# Altium PCB LamplightController.PcbDoc
Units mm, origin at the board's own origin, x right, y up, seen from the top; angles counter-clockwise.
Board outline 48 x 84 mm, 2 copper layers (Top Layer, Bottom Layer), stack 1.5 mm thick; 75 components, 53 nets, 223 pads, 56 vias.
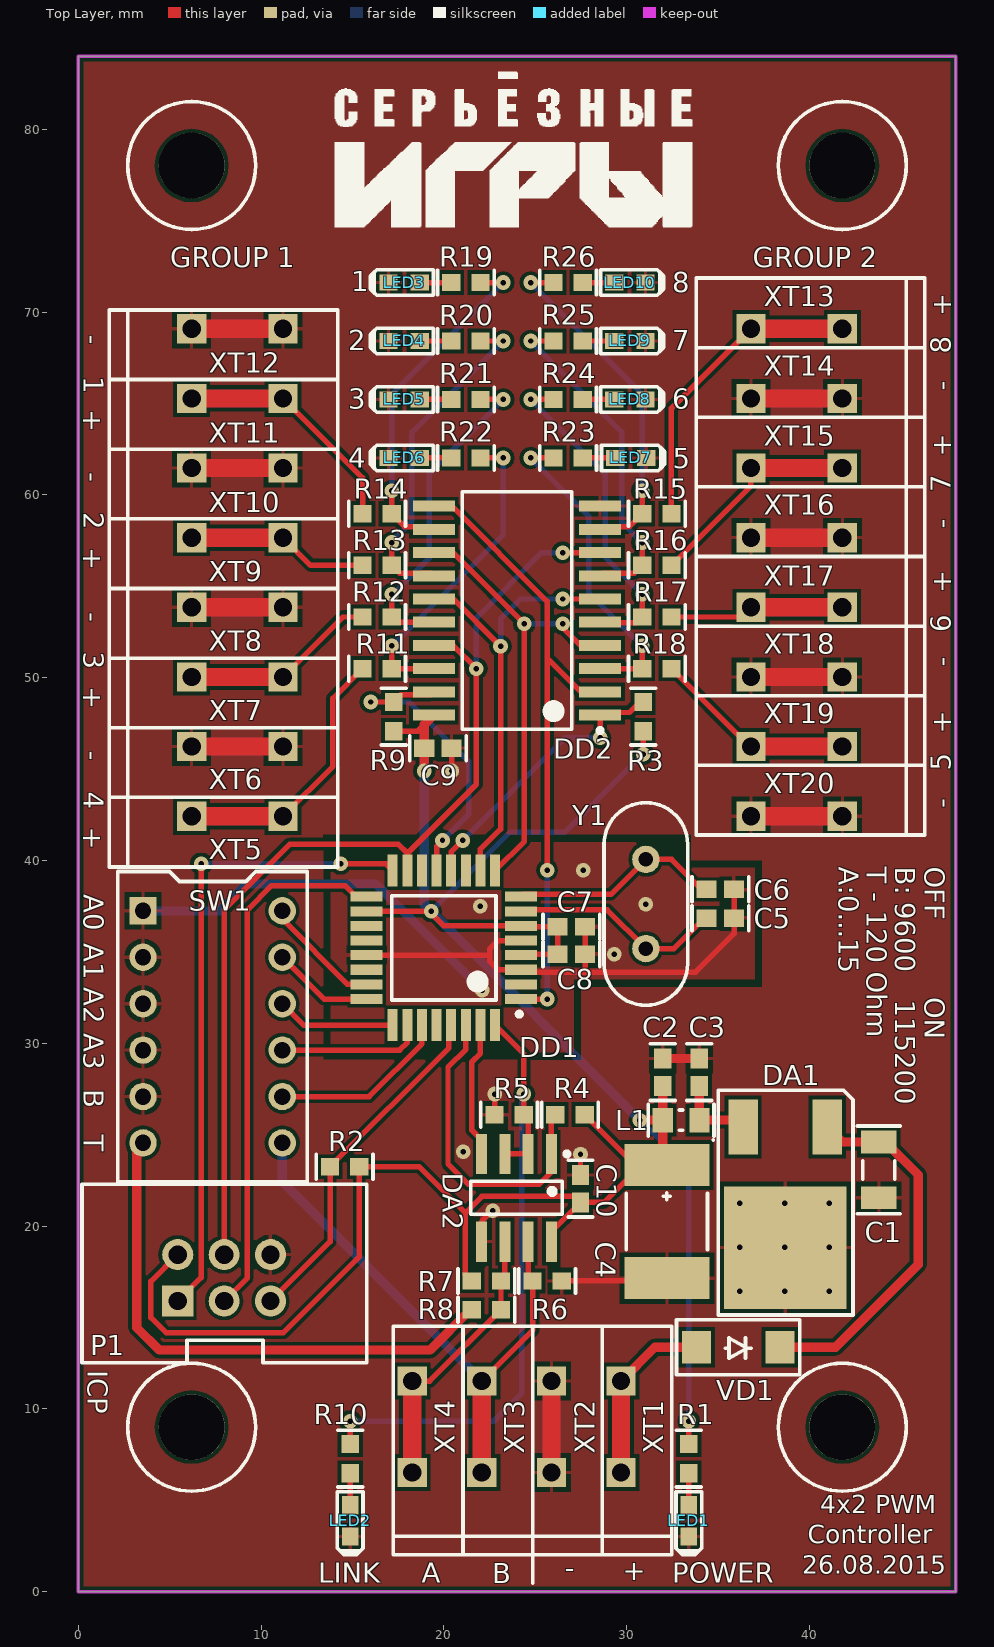
[diagram p0: Top Layer view]
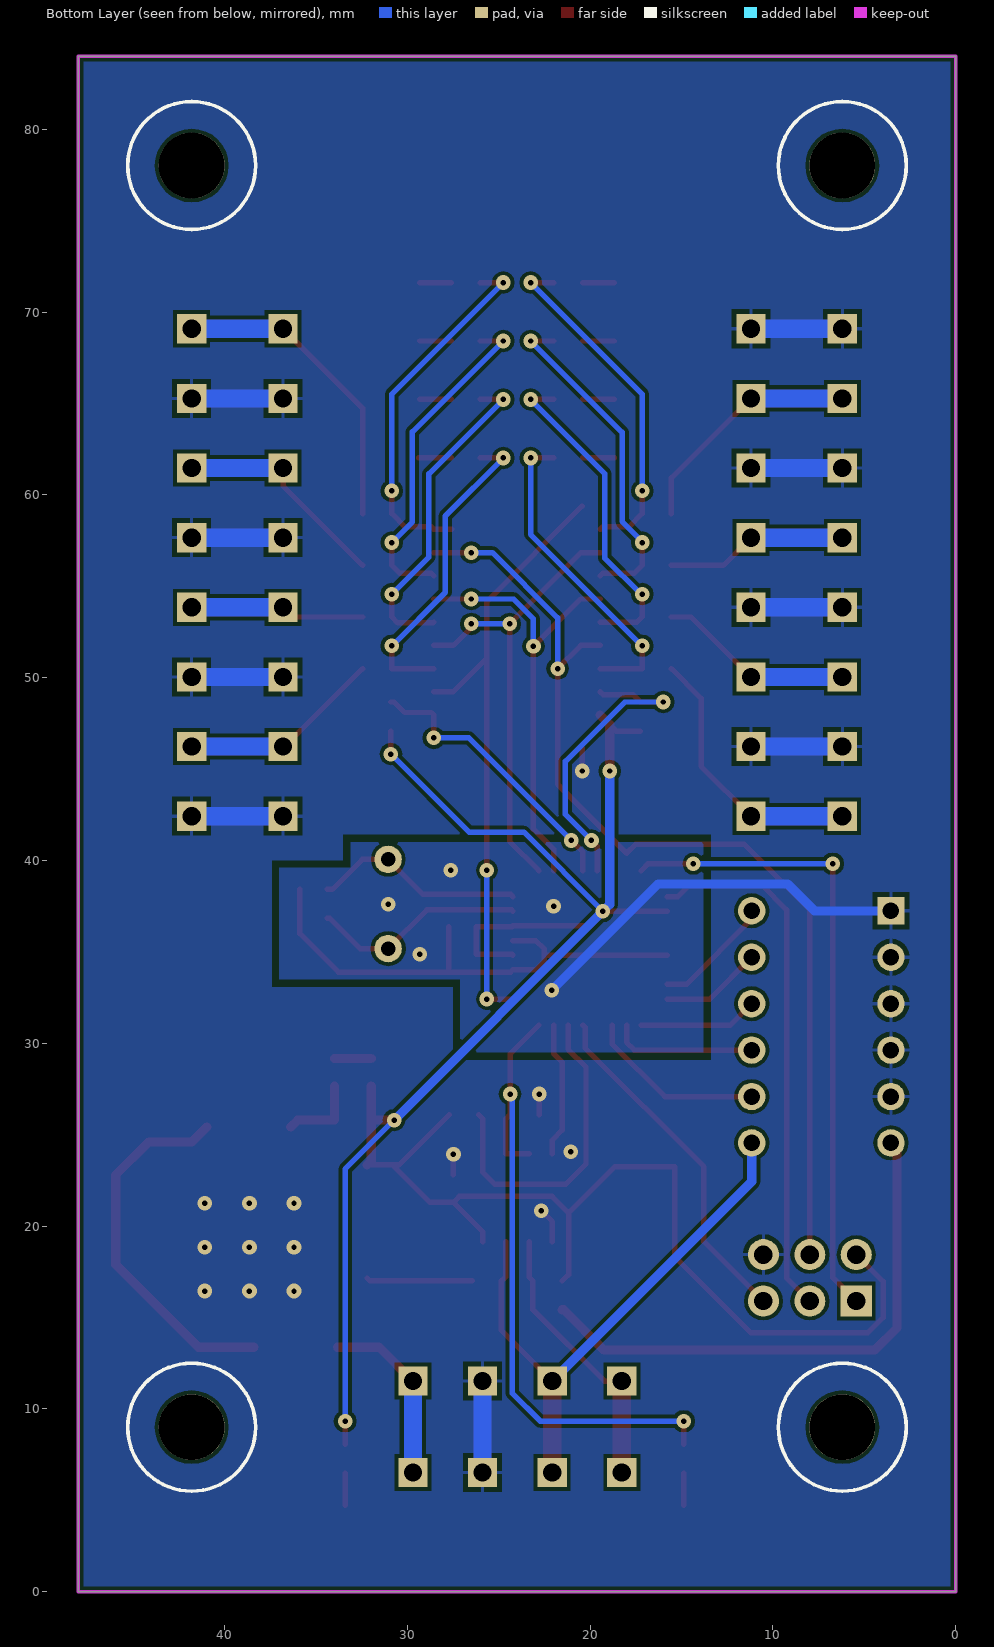
[diagram p1: Bottom Layer view, seen from below]
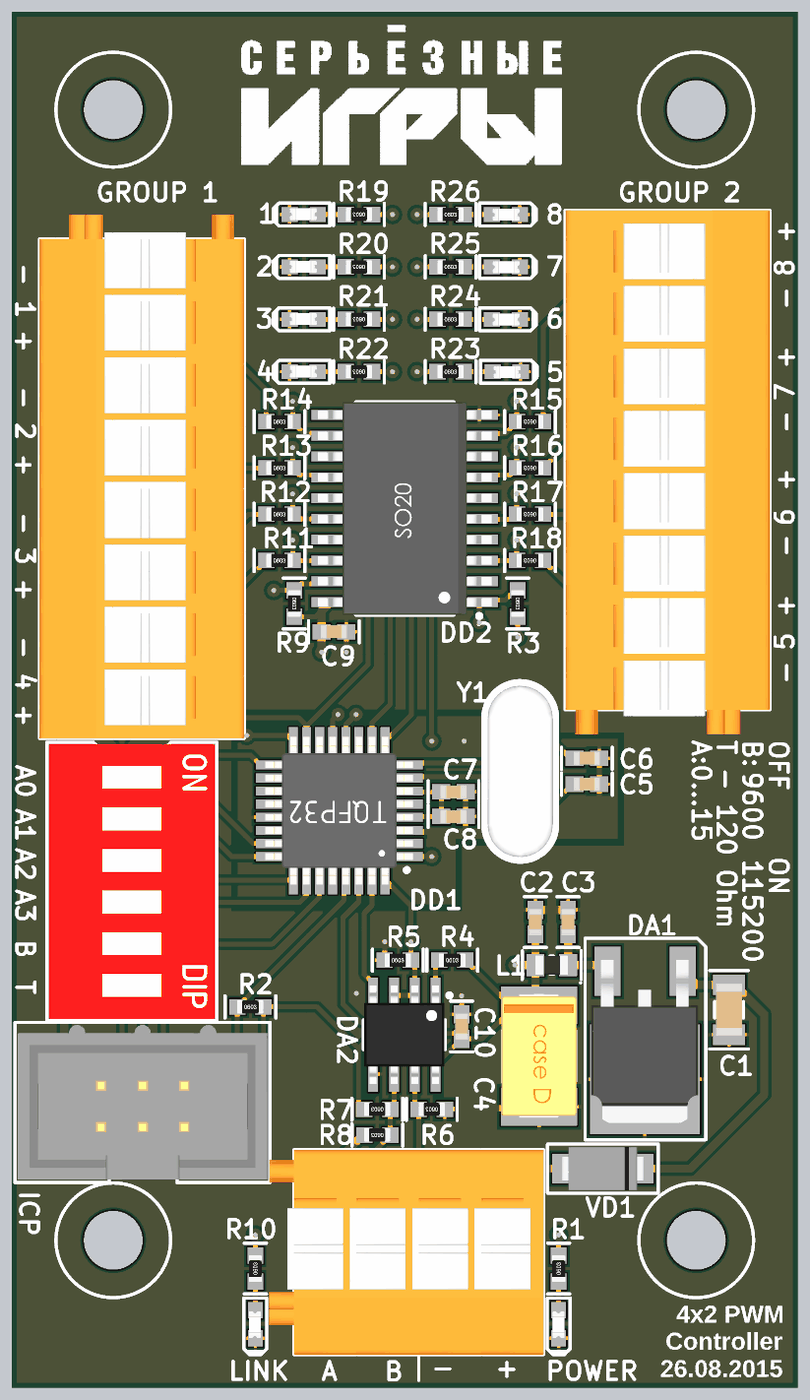
[diagram p2: 3D render of the assembled board from above, using the file's embedded part models]

## Layer stack, top to bottom
Top Solder: solder mask 0.0102, Solder Resist, Dk 3.5
Top Layer: signal copper 0
Dielectric 1: dielectric 1.5, FR-4, Dk 4.8
Bottom Layer: signal copper 0
Bottom Solder: solder mask 0.0102, Solder Resist, Dk 3.5

## Board outline
0,0 0,84 48,84 48,0

## Design rules (kind name [scope] priority, off if disabled: settings)
Clearance [All] p1: gap=0.2
ComponentClearance [All] p1 off: gap=0 collisioncheckmode=3 verticalgap=0.2 showdistances=FALSE
Height [All] p1: minheight=0 maxheight=50 prefheight=2
HoleSize [All] p1: absolutevalues=TRUE maxlimit=5 minlimit=0.3 maxpercent=80.000 minpercent=20.000
HoleToHoleClearance [All] p1: gap=0.2 allowstackedmicrovias=TRUE
MinimumSolderMaskSliver [All] p1: minsoldermaskwidth=0.1
PlaneClearance [All] p1: clearance=0.3
PlaneConnect PlaneConnect_VIA [IsVia] p1: planeconnectstyle=Direct reliefexpansion=0.508 reliefentries=4 reliefconductorwidth=0.254 reliefairgap=0.254
PlaneConnect PlaneConnect_PAD [All] p2: planeconnectstyle=Relief reliefexpansion=0.5 reliefentries=4 reliefconductorwidth=0.2 reliefairgap=0.2
PolygonConnect PolygonConnect_VIA [IsVia] p1: connectstyle=Direct reliefconductorwidth=0.254 reliefentries=4 polygonreliefangle="90 Angle" airgapwidth=0.254
PolygonConnect PolygonConnect_PAD [All] p2: connectstyle=Relief reliefconductorwidth=0.2 reliefentries=4 polygonreliefangle="90 Angle" airgapwidth=0.254
RoutingCorners [All] p1: cornerstyle=45-Degree minsetback=2 maxsetback=2
RoutingVias [All] p1: holewidth=0.3 width=0.8 viastyle="Through Hole" minholewidth=0.3 minwidth=0.8 maxholewidth=0.3 maxwidth=0.8
SilkToSilkClearance [All] p1: silktosilkclearance=0.2
SilkToSolderMaskClearance SilkscreenOverComponentPads [IsPad] p1: minsilkscreentomaskgap=0.2 clearancetoexposedcopper=TRUE
SolderMaskExpansion [All] p1: expansion=0.1
Width [All] p1: maxlimit=2 minlimit=0.2 preferedwidth=0.2 minimp=50.000000 maximp=50.000000 favimp=50.000000
19 further rules are at their usual default settings.

## Components (designator, comment, footprint, x,y, rotation, side; value= is the part's Value field where it differs from the comment)
C1 "C_1206" 1206_CAP 43.8,23.075 r90 top
C2 "C_0603" 0603_CAP 33.975,28.425 r270 top
C3 "C_0603" 0603_CAP 31.975,28.425 r270 top
C4 "C_caseD" "case D" 32.2,20.25 r270 top
C5 "C_0603" 0603_CAP 35.125,36.85 r180 top
C6 "C_0603" 0603_CAP 35.125,38.425 r180 top
C7 "C_0603" 0603_CAP 26.975,36.375 r180 top
C8 "C_0603" 0603_CAP 26.975,34.875 r180 top
C9 "C_0603" 0603_CAP 19.675,46.15 r0 top
C10 "C_0603" 0603_CAP 27.475,22.05 r90 top
DA1 "L78M05ABDT-TR" DPACK 40.975,25.425 r180 top
DA2 "MAX3443EESA" SOIC8 23.975,21.55 r270 top
DD1 "ATMEGA328P-AU" TQFP32 20,35.225 r180 top
DD2 "SN74ABT244ADW" SOIC20 24,53.675 r180 top
L1 "BLM21" 0805_IND 32.975,25.8 r180 top
LED1 "LED_0603" 0603_LED 33.4,3.875 r270 top
LED2 "LED_0603" 0603_LED 14.875,3.875 r270 top
LED3 "LED_0603" 0603_LED 17.825,71.625 r180 top
LED4 "LED_0603" 0603_LED 17.825,68.425 r180 top
LED5 "LED_0603" 0603_LED 17.825,65.225 r180 top
LED6 "LED_0603" 0603_LED 17.825,62.025 r180 top
LED7 "LED_0603" 0603_LED 30.225,62.025 r0 top
LED8 "LED_0603" 0603_LED 30.175,65.225 r0 top
LED9 "LED_0603" 0603_LED 30.175,68.425 r0 top
LED10 "LED_0603" 0603_LED 30.175,71.625 r0 top
P1 "BH-06M" BH-06M 5.425,15.875 r180 top
R1 "R_0603" 0603_RES 33.4,7.275 r90 top
R2 "R_0603" 0603_RES 14.575,23.25 r0 top
R3 "R_0603" 0603_RES 30.9,47.875 r270 top
R4 "R_0603" 0603_RES 26.9,26.1 r0 top
R5 "R_0603" 0603_RES 23.575,26.1 r0 top
R6 "R_0603" 0603_RES 25.65,17 r180 top
R7 "R_0603" 0603_RES 22.325,17 r180 top
R8 "R_0603" 0603_RES 22.325,15.425 r180 top
R9 "R_0603" 0603_RES 17.25,47.875 r270 top
R10 "R_0603" 0603_RES 14.875,7.275 r90 top
R11 "R_0603" 0603_RES 16.35,50.5 r0 top
R12 "R_0603" 0603_RES 16.35,53.325 r0 top
R13 "R_0603" 0603_RES 16.35,56.15 r0 top
R14 "R_0603" 0603_RES 16.35,58.975 r0 top
R15 "R_0603" 0603_RES 31.65,58.975 r180 top
R16 "R_0603" 0603_RES 31.65,56.15 r180 top
R17 "R_0603" 0603_RES 31.65,53.325 r180 top
R18 "R_0603" 0603_RES 31.65,50.5 r180 top
R19 "R_0603" 0603_RES 21.2,71.625 r180 top
R20 "R_0603" 0603_RES 21.2,68.425 r180 top
R21 "R_0603" 0603_RES 21.2,65.225 r180 top
R22 "R_0603" 0603_RES 21.2,62.025 r180 top
R23 "R_0603" 0603_RES 26.8,62.025 r0 top
R24 "R_0603" 0603_RES 26.8,65.225 r0 top
R25 "R_0603" 0603_RES 26.8,68.425 r0 top
R26 "R_0603" 0603_RES 26.8,71.625 r0 top
SW1 "SWD1-6" "DIP_SW 12" 7.35,30.9 r0 top
VD1 "US1M" SMA 36.1,13.375 r0 top
XT1 "235-101" wago235-101 29.695,9.025 r0 top
XT2 "235-101" wago235-101 25.885,9.025 r0 top
XT3 "235-101" wago235-101 22.075,9.025 r0 top
XT4 "235-101" wago235-101 18.265,9.025 r0 top
XT5 "235-101" wago235-101 8.7,42.425 r270 top
XT6 "235-101" wago235-101 8.7,46.235 r270 top
XT7 "235-101" wago235-101 8.7,50.045 r270 top
XT8 "235-101" wago235-101 8.7,53.855 r270 top
XT9 "235-101" wago235-101 8.7,57.665 r270 top
XT10 "235-101" wago235-101 8.7,61.475 r270 top
XT11 "235-101" wago235-101 8.7,65.285 r270 top
XT12 "235-101" wago235-101 8.7,69.095 r270 top
XT13 "235-101" wago235-101 39.3,69.095 r90 top
XT14 "235-101" wago235-101 39.3,65.285 r90 top
XT15 "235-101" wago235-101 39.3,61.475 r90 top
XT16 "235-101" wago235-101 39.3,57.665 r90 top
XT17 "235-101" wago235-101 39.3,53.855 r90 top
XT18 "235-101" wago235-101 39.3,50.045 r90 top
XT19 "235-101" wago235-101 39.3,46.235 r90 top
XT20 "235-101" wago235-101 39.3,42.425 r90 top
Y1 "HC49S" HC49S 31.05,37.625 r270 top

## Footprints (in the part's own frame and the unit in brackets; to place one, negate y for a bottom-side part, rotate by r counter-clockwise, add the part's x,y. Pads: shape width x height; smd on the part's side, far side on the other; paste and mask are expansions set on the pad)
0603_CAP [mm] "Chip Capacitor, 2-Leads, Body 1,60x0,80mm, IPC Medium Density"
  rect 1.1x0.95 smd: 1(-0.75,0) 2(0.75,0)
  silkscreen extent -1.55,-0.68 1.55,0.67, body extent -0.8,-0.4 0.8,0.4, height 0.8
0603_LED [mm]
  rect 1x0.9 smd: 1(-0.85,0) 2(0.85,0)
  silkscreen extent -1.6,-0.7 1.85,0.7, body extent -0.8,-0.37 0.85,0.35, height 0.68
0603_RES [mm] "Chip Resistor, 2-Leads, Body 1,60x0,80mm, IPC Medium Density"
  rect 1x0.95 smd: 1(-0.8,0) 2(0.8,0)
  silkscreen extent -1.55,-0.67 1.55,0.68, body extent -0.8,-0.4 0.8,0.4, height 0.45
0805_IND [mm]
  rect 1.1x1.35 smd: 1(-1,0) 2(1,0)
  silkscreen extent -1.8,-0.88 1.8,0.87, body extent -1,-0.6 1,0.6, height 0.95
1206_CAP [mm] "Chip Capacitor, 2-Leads, Body 3,30x1,70mm, IPC Medium Density"
  rect 1.25x1.95 smd: 1(-1.525,0) 2(1.525,0)
  silkscreen extent -2.4,-1.18 2.4,1.17, body extent -1.6,-0.8 1.6,0.8, height 0.78
BH-06M [mm] "BH-06M ICP Prog"
  rect 1.7x1.7 hole 1: 1(-0.015,-0.025)
  round 1.7 hole 1: 2(-0.015,-2.565) 3(-2.555,-0.025) 4(-2.555,-2.565) 5(-5.095,-0.025) 6(-5.095,-2.565)
  silkscreen extent -10.35,-6.43 5.23,3.35, body extent -10.19,-6.27 5.05,3.18, height 9.1
"case D" [mm] "Chip Capacitor Tantalum CASE D, 2-Leads, Body 7,30x4,30mm, IPC Medium Density"
  rect 2.3x4.65 smd: 1(-3.1,0) 2(3.1,0)
  silkscreen extent -4.51,-2.23 1.55,2.59, body extent -3.8,-2.3 3.8,2.3, height 3.1
"DIP_SW 12" [mm] "DIP Switch 2.54mm 6poles"
  rect 1.5x1.5 hole 0.9: 1(-3.81,6.35)
  round 1.5 hole 0.9: 2(-3.81,3.81) 3(-3.81,1.27) 4(-3.81,-1.27) 5(-3.81,-3.81) 6(-3.81,-6.35) 7(3.81,-6.35) 8(3.81,-3.81) 9(3.81,-1.27) 10(3.81,1.27) 11(3.81,3.81) 12(3.81,6.35)
  silkscreen extent -5.2,-8.47 5.18,8.5, body extent -5.08,-8.37 5.08,8.39, height 7.1
DPACK [mm]
  rect 1.6x3 smd: 1(0,0) 2(4.6,0)
  rect 6.7x6.7 smd: 3(2.3,6.6)
  silkscreen extent -1.41,-2.01 5.96,10.29, body extent -0.95,-0.68 5.59,9.26, height 2.39
HC49S [mm]
  round 1.5 hole 0.8: 1(-2.44,0) 2(2.44,0)
  silkscreen extent -5.54,-2.29 5.54,2.29, body extent -5.49,-2.25 5.49,2.25, height 3.6
SMA [mm]
  rect 1.6x1.8 smd: 1(-2.286,0) 2(2.286,0)
  silkscreen extent -3.37,-1.5 3.38,1.5, body extent -2.56,-1.33 2.55,1.33, height 2.12
SOIC8 [mm] "SOIC, 8-Leads, Body 4,90x3,90mm, Pitch 1,27mm, IPC Medium Density"
  rect 2.2x0.6 smd: 1(-2.4,1.905) 2(-2.4,0.635) 3(-2.4,-0.635) 4(-2.4,-1.905) 5(2.4,-1.905) 6(2.4,-0.635) 7(2.4,0.635) 8(2.4,1.905)
  silkscreen extent -2.52,-2.5 0.9,2.88, body extent -3,-2.45 3,2.45, height 1.75
SOIC20 [mm] "SOIC, 20-Leads, Body 12,80x7,50mm, Pitch 1,27mm, IPC Medium Density"
  rect 2.3x0.6 smd: 1(-4.55,5.715) 2(-4.55,4.445) 3(-4.55,3.175) 4(-4.55,1.905) 5(-4.55,0.635) 6(-4.55,-0.635) 7(-4.55,-1.905) 8(-4.55,-3.175) 9(-4.55,-4.445) 10(-4.55,-5.715) 11(4.55,-5.715) 12(4.55,-4.445) 13(4.55,-3.175) 14(4.55,-1.905) 15(4.55,-0.635) 16(4.55,0.635) 17(4.55,1.905) 18(4.55,3.175) 19(4.55,4.445) 20(4.55,5.715)
  silkscreen extent -4.68,-6.5 3,6.69, body extent -5.31,-6.5 5.32,6.5, height 2.66
TQFP32 [mm] "TQFP, 32-Leads, Body 7,00x7,00mm, Pitch 0,80mm, IPC Medium Density"
  rect 1.75x0.55 smd: 1(-4.225,2.8) 2(-4.225,2) 3(-4.225,1.2) 4(-4.225,0.4) 5(-4.225,-0.4) 6(-4.225,-1.2) 7(-4.225,-2) 8(-4.225,-2.8) 17(4.225,-2.8) 18(4.225,-2) 19(4.225,-1.2) 20(4.225,-0.4) 21(4.225,0.4) 22(4.225,1.2) 23(4.225,2) 24(4.225,2.8)
  rect 0.55x1.75 smd: 9(-2.8,-4.225) 10(-2,-4.225) 11(-1.2,-4.225) 12(-0.4,-4.225) 13(0.4,-4.225) 14(1.2,-4.225) 15(2,-4.225) 16(2.8,-4.225) 25(2.8,4.225) 26(2,4.225) 27(1.2,4.225) 28(0.4,4.225) 29(-0.4,4.225) 30(-1.2,4.225) 31(-2,4.225) 32(-2.8,4.225)
  silkscreen extent -4.25,-2.85 2.85,3.75, body extent -4.51,-4.51 4.51,4.51, height 1.1
wago235-101 [mm] "1-conductor PCB terminal strip; 2 solder pins/pole; 2-pole; pin spacing 3.81 mm / 0.15 in; with push-button"
  rect 1.6x1.6 hole 1: 1(0,-2.5) 1(0,2.5)
  silkscreen extent -1.03,-7 2.78,5.5, body extent -2.53,-7 2.78,5.5, height 15.5

## Part data
C1: "Конденсатор (1206)"
C2 C3 C5 C6 C7 C8 C9 C10: "Конденсатор (0603)"
C4: "Танаталовый чип конденсатор (Case D)"
DA1: "Precision 500 mA regulator 5V"
DA2: "5 V RS-485 Transceiver"
DD1: "ATMEL 8-BIT MICROCONTROLLER WITH 32KBYTES  IN-SYSTEM PROGRAMMABLE FLASH 2K RAM 20MHz"
DD2: "Octal Buffers/Drivers with 3-state outputs"
L1: "Chip Ferrite Bead (0805 Size) BLM21PG221SH1"
LED1 LED2 LED3 LED4 LED5 LED6 LED7 LED8 LED9 LED10: "Светодиод 0603"
R1 R2 R10 R11 R12 R13 R14 R15 R16 R17 R18 R19 R20 R21 R22 R23 R24 R25 R26: "Резистор 0.1 Вт (0603)"
R3 R4 R5 R6 R7 R8 R9: "Резистор 0.063 Вт (0603)"
SW1: "DIP-переключатель 2-х полож. 6 кн. 2.54mm"
VD1: "Диод 1А до 1000V"
XT1 XT2 XT3 XT4 XT5 XT6 XT7 XT8 XT9 XT10 XT11 XT12 XT13 XT14 XT15 XT16 XT17 XT18 XT19 XT20: library part wago235-101, "235-101 - 1-CONDUCTOR PCB TERMINAL BLOCK 2 SOLDER PINS / POLE 1 POLE PIN SPACING 3.81 MM / 0.15 IN WITH PUSH BOTTONS"
Y1: library part Quartz_HC49S, "Кварцевый резонатор (HC49S)"

## Free pads (board coordinates)
  round 3.6 hole 3.6 unplated: 0(6.2,9) 0(6.2,78.025) 0(41.8,9) 0(41.8,78.025)

## Via types
v1: diameter 0.8, hole 0.3, Top Layer to Bottom Layer, tented both sides, 47 vias
v2: diameter 0.8, hole 0.3, Top Layer to Bottom Layer, tented bottom, 9 vias

## Nets (pads, with @x,y where several pads share a name; then routed paths per layer and width w, separated by ;. In a path a pad name is that pad's centre, name@x,y a point inside that pad or via, vN(x,y) a via of type N, cw(c..) or ccw(c..) an arc to the next point about the centre after c; other vN are vias at no path point)
B: DA2.7 R6.2 SW1.7 XT3.1 | length 31.4
  Top Layer w0.3: XT3.1@22.075,11.525 24.85,14.3 R6.2 24.61,17.24 DA2.7
  Top Layer w1: XT3.1@22.075,6.525 XT3.1@22.075,11.525
  Bottom Layer w0.5: SW1.7 11.16,22.44 XT3.1@22.075,11.525
BSW: R8.2 SW1.6 | length 30
  Top Layer w0.5: SW1.6 3.2,24.21 3.2,14.45 4.425,13.225 19.25,13.225 21.45,15.425 R8.2
GND: C1.1 C2.1 C3.1 C4.2 C5.1 C6.1 C7.1 C8.1 C9.2 C10.2 DA1.3 DA2.5 DD1.3 DD1.5 DD1.21 DD2.10 LED1.2 LED2.2 LED3.2 LED4.2 LED5.2 LED6.2 LED7.2 LED8.2 LED9.2 LED10.2 P1.6 R5.1 R6.1 SW1.1 SW1.2 SW1.3 SW1.4 SW1.5 XT2.1 XT6.1 XT8.1 XT10.1 XT12.1 XT14.1 XT16.1 XT18.1 XT20.1 | length 153.6
  Top Layer w0.3: DD1.21 22.5,34.825 ; v1(20.425,44.9) C9.2 ; DA2.5 22.07,20.245 v1(22.676,20.851) ; R5.1 v1(22.775,27.225) ; DD1.5 22.975,35.625 22.5,35.15 22.5,34.825 ; R6.1 32.05,17 C4.2 ; C10.2 v1(27.475,23.925) ; C7.1 C8.1 27.725,33.925 27.7,33.9 ; C6.1 C5.1 35.875,36 33.775,33.9 27.7,33.9 ; 22.5,34.825 22.5,34.5 22.975,34.025 DD1.3 24.35,33.9 27.7,33.9
  Top Layer w0.5: C3.1 C2.1
  Top Layer w1: XT6.1@6.2,46.235 XT6.1@11.2,46.235 ; XT8.1@6.2,53.855 XT8.1@11.2,53.855 ; XT10.1@6.2,61.475 XT10.1@11.2,61.475 ; XT12.1@6.2,69.095 XT12.1@11.2,69.095 ; XT2.1@25.885,6.525 XT2.1@25.885,11.525 ; XT20.1@36.8,42.425 XT20.1@41.8,42.425 ; XT18.1@36.8,50.045 XT18.1@41.8,50.045 ; XT16.1@36.8,57.665 XT16.1@41.8,57.665 ; XT14.1@36.8,65.285 XT14.1@41.8,65.285
  Bottom Layer w0.3: v1@22.826,20.851 v1@22.826,20.926
  Bottom Layer w0.5: SW1.1 7.725,37.25 9.2,38.725 16.275,38.725 v1(22.1,32.9)
  Bottom Layer w1: XT6.1@6.2,46.235 XT6.1@11.2,46.235 ; XT8.1@6.2,53.855 XT8.1@11.2,53.855 ; XT10.1@6.2,61.475 XT10.1@11.2,61.475 ; XT12.1@6.2,69.095 XT12.1@11.2,69.095 ; XT2.1@25.885,6.525 XT2.1@25.885,11.525 ; XT20.1@36.8,42.425 XT20.1@41.8,42.425 ; XT18.1@36.8,50.045 XT18.1@41.8,50.045 ; XT16.1@36.8,57.665 XT16.1@41.8,57.665 ; XT14.1@36.8,65.285 XT14.1@41.8,65.285
  other v1: 21.05,24.075 29.325,34.875 22,37.5 31.05,37.615 27.625,39.475
  other v2: 36.2,16.45 38.638,16.45 41.075,16.45 36.2,18.85 38.638,18.85 41.075,18.85 36.2,21.25 38.638,21.25 41.075,21.25
MISO: DD1.16 P1.1 | length 35.1
  Top Layer w0.3: P1.1 6.725,17.185 v1(6.725,39.825) ; v1(14.35,39.825) 16.825,39.825 DD1.16
  Bottom Layer w0.3: v1(6.725,39.825) v1(14.35,39.825)
MOSI: DD1.15 DD2.8 DD2.17 P1.4 | length 56.1
  Top Layer w0.3: P1.4 7.98,37.305 11.575,40.9 17.5,40.9 18,40.4 21.775,44.175 v1(21.775,50.5) 20.505,51.77 DD2.17 ; v1(26.5,56.85) DD2.8
  Bottom Layer w0.3: v1(21.775,50.5) 21.775,53.275 25.35,56.85 v1(26.5,56.85)
NetC1_2: C1.2 DA1.1 VD1.2 | length 20.4
  Top Layer w0.5: VD1.2 41.425,13.375 45.95,17.9 45.95,22.8 44.15,24.6 C1.2 41.8,24.6 DA1.1
NetC2_2: C2.2 DA1.2 L1.1 | length 4.4
  Top Layer w0.5: C2.2 L1.1 36,25.8 DA1.2
NetDA2_6: DA2.6 R7.1 R8.1 XT4.1 | length 15.3
  Top Layer w0.3: XT4.1@18.265,11.525 19.225,11.525 R8.1 R7.1 23.34,17.215 DA2.6
  Top Layer w1: XT4.1@18.265,6.525 XT4.1@18.265,11.525
NetDD1_23: DD1.23 SW1.12 | length 6.6
  Top Layer w0.3: SW1.12 11.16,36.79 14.725,33.225 DD1.23
NetDD1_24: DD1.24 SW1.11 | length 5.6
  Top Layer w0.3: SW1.11 13.445,32.425 DD1.24
NetDD1_25: DD1.25 SW1.10 | length 6.5
  Top Layer w0.3: SW1.10 12.33,31 DD1.25
NetDD1_26: DD1.26 SW1.9 | length 8
  Top Layer w0.3: SW1.9 17.58,29.63 18,30.05 DD1.26
NetDD1_27: DD1.27 SW1.8 | length 9.9
  Top Layer w0.3: SW1.8 15.915,27.09 18.8,29.975 DD1.27
NetLED1_1: LED1.1 R1.1 | length 1.8
  Top Layer w0.3: LED1.1 R1.1
NetLED2_1: LED2.1 R10.1 | length 1.8
  Top Layer w0.3: LED2.1 R10.1
NetLED3_1: LED3.1 R19.2 | length 1.7
  Top Layer w0.3: LED3.1 R19.2
NetLED4_1: LED4.1 R20.2 | length 1.7
  Top Layer w0.3: LED4.1 R20.2
NetLED5_1: LED5.1 R21.2 | length 1.7
  Top Layer w0.3: LED5.1 R21.2
NetLED6_1: LED6.1 R22.2 | length 1.7
  Top Layer w0.3: LED6.1 R22.2
NetLED7_1: LED7.1 R23.2 | length 1.8
  Top Layer w0.3: R23.2 LED7.1
NetLED8_1: LED8.1 R24.2 | length 1.7
  Top Layer w0.3: R24.2 LED8.1
NetLED9_1: LED9.1 R25.2 | length 1.7
  Top Layer w0.3: R25.2 LED9.1
NetLED10_1: LED10.1 R26.2 | length 1.7
  Top Layer w0.3: R26.2 LED10.1
NetR11_1: R11.1 XT5.1 | length 19.9
  Top Layer w0.3: XT5.1@11.2,42.425 13.925,45.15 13.925,48.875 R11.1
  Top Layer w1: XT5.1@6.2,42.425 XT5.1@11.2,42.425
  Bottom Layer w1: XT5.1@6.2,42.425 XT5.1@11.2,42.425
NetR12_1: R12.1 XT7.1 | length 15.7
  Top Layer w0.3: XT7.1@11.2,50.045 14.48,53.325 R12.1
  Top Layer w1: XT7.1@6.2,50.045 XT7.1@11.2,50.045
  Bottom Layer w1: XT7.1@6.2,50.045 XT7.1@11.2,50.045
NetR13_1: R13.1 XT9.1 | length 15
  Top Layer w0.3: XT9.1@11.2,57.665 12.715,56.15 R13.1
  Top Layer w1: XT9.1@6.2,57.665 XT9.1@11.2,57.665
  Bottom Layer w1: XT9.1@6.2,57.665 XT9.1@11.2,57.665
NetR14_1: R14.1 XT11.1 | length 18.1
  Top Layer w0.3: XT11.1@11.2,65.285 15.55,60.935 R14.1
  Top Layer w1: XT11.1@6.2,65.285 XT11.1@11.2,65.285
  Bottom Layer w1: XT11.1@6.2,65.285 XT11.1@11.2,65.285
NetR15_1: R15.1 XT13.1 | length 21.9
  Top Layer w0.3: R15.1 32.45,64.745 XT13.1@36.8,69.095
  Top Layer w1: XT13.1@36.8,69.095 XT13.1@41.8,69.095
  Bottom Layer w1: XT13.1@36.8,69.095 XT13.1@41.8,69.095
NetR16_1: R16.1 XT15.1 | length 17.1
  Top Layer w0.3: R16.1 36.8,60.5 XT15.1@36.8,61.475
  Top Layer w1: XT15.1@36.8,61.475 XT15.1@41.8,61.475
  Bottom Layer w1: XT15.1@36.8,61.475 XT15.1@41.8,61.475
NetR17_1: R17.1 XT17.1 | length 14.6
  Top Layer w0.3: R17.1 36.27,53.325 XT17.1@36.8,53.855
  Top Layer w1: XT17.1@36.8,53.855 XT17.1@41.8,53.855
  Bottom Layer w1: XT17.1@36.8,53.855 XT17.1@41.8,53.855
NetR18_1: R18.1 XT19.1 | length 16.1
  Top Layer w0.3: R18.1 36.715,46.235 XT19.1@36.8,46.235
  Top Layer w1: XT19.1@36.8,46.235 XT19.1@41.8,46.235
  Bottom Layer w1: XT19.1@36.8,46.235 XT19.1@41.8,46.235
NetVD1_1: VD1.1 XT1.1 | length 14.9
  Top Layer w0.5: XT1.1@29.695,11.525 31.545,13.375 VD1.1
  Top Layer w1: XT1.1@29.695,6.525 XT1.1@29.695,11.525
  Bottom Layer w1: XT1.1@29.695,6.525 XT1.1@29.695,11.525
OE1: DD1.12 DD2.1 R3.1 | length 15.7
  Top Layer w0.3: DD1.12 20.4,40.475 v1(21.025,41.1) ; v1(28.55,46.71) DD2.1 28.69,48.1 30.15,48.1 30.725,48.675 R3.1
  Bottom Layer w0.3: v1(21.025,41.1) 26.635,46.71 v1(28.55,46.71)
OE2: DD1.13 DD2.19 R9.1 | length 17.1
  Top Layer w0.3: v1(16,48.675) R9.1 17.65,49.075 19.295,49.075 DD2.19 ; DD1.13 19.6,40.775 v1(19.925,41.1)
  Bottom Layer w0.3: v1(16,48.675) 18.1,48.675 21.35,45.425 21.35,42.525 v1(19.925,41.1)
OPWM11: DD2.12 R14.2 R19.1 | length 19.1
  Top Layer w0.3: v1(17.15,60.225) R14.2 17.85,58.275 19.295,58.275 DD2.12 ; R19.1 v1(23.25,71.625)
  Bottom Layer w0.3: v1(17.15,60.225) 17.15,65.525 v1(23.25,71.625)
OPWM12: DD2.14 R13.2 R20.1 | length 18.6
  Top Layer w0.3: v1(17.15,57.4) R13.2 17.575,55.725 19.305,55.725 DD2.14 ; R20.1 v1(23.25,68.425)
  Bottom Layer w0.3: v1(17.15,57.4) 17.15,57.45 18.25,58.55 18.25,63.425 v1(23.25,68.425)
OPWM13: DD2.16 R12.2 R21.1 | length 18.1
  Top Layer w0.3: v1(17.15,54.575) R12.2 17.435,53.04 DD2.16 ; R21.1 v1(23.25,65.225)
  Bottom Layer w0.3: v1(17.15,54.575) 17.225,54.575 19.2,56.55 19.2,61.175 v1(23.25,65.225)
OPWM14: DD2.18 R11.2 R22.1 | length 17.6
  Top Layer w0.3: v1(17.15,51.75) R11.2 DD2.18 ; R22.1 v1(23.25,62.025)
  Bottom Layer w0.3: v1(17.15,51.75) 23.25,57.85 v1(23.25,62.025)
OPWM21: DD2.3 R18.2 R23.1 | length 17.6
  Top Layer w0.3: v1(24.75,62.025) R23.1 ; DD2.3 R18.2 v1(30.85,51.75)
  Bottom Layer w0.3: v1(24.75,62.025) 27.925,58.85 27.925,54.675 v1(30.85,51.75)
OPWM22: DD2.5 R17.2 R24.1 | length 18.1
  Top Layer w0.3: v1(24.75,65.225) R24.1 ; DD2.5 28.59,53 30.525,53 R17.2 v1(30.85,54.575)
  Bottom Layer w0.3: v1(24.75,65.225) 28.825,61.15 28.825,56.6 v1(30.85,54.575)
OPWM23: DD2.7 R16.2 R25.1 | length 18.6
  Top Layer w0.3: v1(24.75,68.425) R25.1 ; DD2.7 28.695,55.725 30.425,55.725 R16.2 v1(30.85,57.4)
  Bottom Layer w0.3: v1(24.75,68.425) 29.725,63.45 29.725,58.525 v1(30.85,57.4)
OPWM24: DD2.9 R15.2 R26.1 | length 20.1
  Top Layer w0.3: v1(24.75,71.625) R26.1 ; DD2.9@27.58,58.12 DD2.9 28.68,58.25 30.125,58.25 R15.2 v1(30.85,60.225)
  Bottom Layer w0.3: v1(24.75,71.625) 30.85,65.525 v1(30.85,60.225)
PWM2: DD1.10 DD2.6 DD2.15 | length 24.9
  Top Layer w0.3: DD2.15 20.515,54.31 v1(23.1,51.725) 23.1,41.725 22,40.625 DD1.10 ; v1(26.5,54.31) DD2.6
  Bottom Layer w0.3: v1(23.1,51.725) 23.1,53.225 24.185,54.31 v1(26.5,54.31)
PWM3: DD1.9 DD2.4 DD2.13 | length 25.5
  Top Layer w0.3: DD2.13 20.5,56.85 v1(24.4,52.95) 24.4,41.05 DD1.9 ; v1(26.5,52.95) 26.5,52.75 27.48,51.77 DD2.4
  Bottom Layer w0.3: v1(24.4,52.95) v1(26.5,52.95)
PWM4: DD1.1 DD2.2 DD2.11 | length 34.2
  Top Layer w0.3: DD2.11@20.435,59.39 25.65,54.175 25.65,51.075 ; DD1.1 v1(25.65,32.425) ; v1(25.65,39.475) 25.65,51.075 ; DD2.2 27.495,49.23 25.65,51.075
  Bottom Layer w0.3: v1(25.65,32.425) v1(25.65,39.475)
RESET: DD1.29 P1.5 R2.1 | length 19.2
  Top Layer w0.3: P1.5 13.775,19.155 R2.1 20.275,29.75 20.275,30.875 DD1.29
RX: DA2.1 DD1.30 R4.1 | length 17.6
  Top Layer w0.3: DD1.30 21.2,29.675 20.225,28.7 20.225,23.4 21.325,22.3 25.225,22.3 25.88,22.955 DA2.1 25.88,25.88 R4.1
SCK: DD1.17 P1.3 | length 29.2
  Top Layer w0.3: P1.3 9.25,17.17 9.25,37.3 10.575,38.625 14.6,38.625 15.2,38.025 DD1.17
STR: DA2.2 DA2.3 DD1.32 R5.2 R10.2 | length 36.8
  Top Layer w0.3: R10.2@14.875,8.075 v1(14.875,9.325) ; DD1.32 24.375,29.425 R5.2 24.61,25.865 DA2.2 ; DA2.3 DA2.2 ; DA2.2@24.6,23.96 DA2.2
  Bottom Layer w0.3: v1(14.875,9.325) 22.725,9.325 24.25,10.85 24.25,27.1 v1(24.375,27.225)
TX: DA2.4 DD1.31 | length 7.5
  Top Layer w0.3: DD1.31 22,29.45 21.525,28.975 21.525,25.25 22.07,24.705 DA2.4
VCC: C3.2 C4.1 C7.2 C8.2 C9.1 C10.1 DA2.8 DD1.4 DD1.6 DD1.18 DD2.20 L1.2 P1.2 R1.2 R2.2 R3.2 R4.2 R7.2 R9.2 | length 136.9
  Top Layer w0.3: P1.2 3.975,16.975 3.975,15 4.8,14.175 11.225,14.175 15.375,18.325 R2.2 18.65,23.25 21.175,20.725 ; DD1.18 19.2,37.225 20,36.425 DD1.6 24.275,36.375 C7.2 C8.2 24.275,34.875 DD1.4 ; R9.2 18.565,47.075 18.925,47.435 ; R7.2 21.175,17.35 21.175,20.725 ; DA2.8 25.88,19.705 C10.1 ; R4.2 30.45,23.35 C4.1@30.8,23.35 ; v1(30.9,45.825) R3.2 ; C4.1 C4.1@30.8,23.35 ; R1.2 v1(33.4,9.325) ; 21.175,20.725 22.075,21.625 27.15,21.625 C10.1 ; C10.1 28.75,21.3 C4.1@30.8,23.35
  Top Layer w0.5: v1(18.925,44.9) C9.1 18.925,47.435 DD2.20 ; v1(30.725,25.8) L1.2 ; C3.2 L1.2 ; C4.1 31.975,23.575 L1.2
  Bottom Layer w0.3: v1(19.3,37.225) 23.625,41.55 26.625,41.55 v1(30.9,45.825) ; v1(30.725,25.8) 33.4,23.125 v1(33.4,9.325)
  Bottom Layer w0.5: v1(18.925,44.9) 18.925,37.6 v1(19.3,37.225) v1(30.725,25.8)
XTAL1: C5.2 DD1.7 Y1.2 | length 11.7
  Top Layer w0.3: DD1.7 24.3,37.3 28.935,37.3 Y1.2 32.585,35.185 34.25,36.85 C5.2
XTAL2: C6.2 DD1.8 Y1.1 | length 11.7
  Top Layer w0.3: DD1.8 24.35,38.15 29.135,38.15 Y1.1 32.46,40.065 34.1,38.425 C6.2
pads on no net: DD1.2 DD1.11 DD1.14 DD1.19 DD1.20 DD1.22 DD1.28

## Polygon pours and split planes (outlines as drawn)
GND on Bottom Layer "Bottom Layer-No Net" (solid, pour order 2): 0,84.225 48,84.225 48,29.1 27.5,29.1 27.5,33.1 37.4,33.1 37.4,40 33.5,40 33.5,41.4 13.4,41.4 13.4,29.1 48,29.1 48,0 0,0
GND on Bottom Layer "Bottom Layer-No Net" (solid, pour order 13): 37,33.5 37,39.6 33.1,39.6 33.1,41 13.9,41 13.8,40.9 13.8,29.5 27.1,29.5 27.1,33.5
GND on Top Layer "Bottom Layer-No Net" (solid, pour order 9): 0,84.225 0,0 48,0 48,33.1 27.5,33.1 27.5,29.1 13.4,29.1 13.4,41.4 33.5,41.4 33.5,40 37.4,40 37.4,33.1 48,33.1 48,84.225
GND on Top Layer "Bottom Layer-No Net" (solid, pour order 11): 27.1,29.5 27.1,33.5 37,33.5 37,39.6 33.1,39.6 33.1,41 13.8,41 13.8,29.5

## Keep-outs
Keep-Out Layer:
  the board outline again, w0.2

## Silkscreen, mask and mechanical layers (free items; w line width, h text height)
Top Overlay:
  drawing of 1070 lines, arcs and shapes, not listed
  text "GROUP 1" at 5.025,72.45 h1.1
  text "GROUP 2" at 36.9,72.45 h1.1
  text "1" at 14.925,71.15 h1.1
  text "8" at 32.5,71.1 h1.1
  text "+" at 47.75,69.775 h1.1 r90
  text "-" at 0.275,68.775 h1.1 r270
  text "2" at 14.775,67.925 h1.1
  text "7" at 32.5,67.925 h1.1
  text "8" at 47.725,67.725 h1.1 r90
  text "1" at 0.3,66.5 h1.1 r270
  text "-" at 47.75,65.7 h1.1 r90
  text "3" at 14.775,64.725 h1.1
  text "6" at 32.5,64.725 h1.1
  text "+" at 0.275,64.7 h1.1 r270
  text "+" at 47.75,62.1 h1.1 r90
  text "4" at 14.775,61.5 h1.1
  text "5" at 32.525,61.475 h1.1
  text "-" at 0.275,61.25 h1.1 r270
  text "7" at 47.725,60.15 h1.1 r90
  text "2" at 0.3,59.05 h1.1 r270
  text "-" at 47.75,58.15 h1.1 r90
  text "+" at 0.275,57.15 h1.1 r270
  text "+" at 47.75,54.625 h1.1 r90
  text "-" at 0.275,53.575 h1.1 r270
  text "6" at 47.725,52.5 h1.1 r90
  text "3" at 0.3,51.425 h1.1 r270
  text "-" at 47.75,50.6 h1.1 r90
  text "+" at 0.275,49.525 h1.1 r270
  text "+" at 47.75,46.925 h1.1 r90
  text "-" at 0.275,46 h1.1 r270
  text "5" at 47.725,44.9 h1.1 r90
  text "4" at 0.3,43.775 h1.1 r270
  text "-" at 47.75,42.85 h1.1 r90
  text "+" at 0.275,41.85 h1.1 r270
  text "A:0...15" at 41.6,39.65 h1.1 r270
  text "T - 120 Ohm" at 43.125,39.65 h1.1 r270
  text "B:" at 44.7,39.65 h1.1 r270
  text "OFF" at 46.3,39.65 h1.1 r270
  text "A0" at 0.3,38.15 h1.1 r270
  text "9600" at 44.7,37.725 h1.1 r270
  text "A1" at 0.3,35.475 h1.1 r270
  text "A2" at 0.3,33.075 h1.1 r270
  text "ON" at 46.3,32.525 h1.1 r270
  text "115200" at 44.7,32.375 h1.1 r270
  text "A3" at 0.3,30.55 h1.1 r270
  text "B" at 0.3,27.475 h1.1 r270
  text "T" at 0.3,25 h1.1 r270
  text "ICP" at 0.525,12.125 h1.1 r270
  text "4x2 PWM" at 40.593,3.975 h1.7
  text "Controller" at 39.919,2.325 h1.7
  text "-" at 27.15,1.575 h1.1 r180
  text "+" at 31.05,1.55 h1.1 r180
  text "26.08.2015" at 39.601,0.65 h1.7
  text "LINK" at 13.125,0.5 h1.1
  text "A" at 18.8,0.5 h1.1
  text "POWER" at 32.5,0.5 h1.1
  text "B" at 22.65,0.475 h1.1
Bottom Overlay:
  circle w0.2: c6.2,9 r3.5
  circle w0.2: c41.8,9 r3.5
  circle w0.2: c41.8,78.025 r3.5
  circle w0.2: c6.2,78.025 r3.5